# EAGLE board BasePlate (EAGLE 7.6.0)

Size 292.16 x 120 mm. Coordinates in mm from the lower left corner, seen from the top.
Outline: 53.08,120 113.08,120 arc-90 118.08,115 118.08,65 arc90 123.08,60 127.08,60 arc-90 132.08,55 132.08,54 arc90 137.08,49 155.08,49 arc90 160.08,54 160.08,55 arc-90 165.08,60 171.08,60 arc90 176.08,65 176.08,115 arc-90 181.08,120 239.08,120 arc-90 292.08,60 arc-90 239.08,0 53.08,0 arc-90 0.08,60 arc-90 53.08,120
Outline: 70.08,39 70.08,81 arc90 68.08,83 63.08,83 arc-90 61.08,85 61.08,86 arc90 59.08,88 17.08,88 arc90 15.08,86 15.08,85 arc-90 13.08,83 11.08,83 arc90 9.08,81 9.08,39 arc90 11.08,37 13.08,37 arc-90 15.08,35 15.08,34 arc90 17.08,32 59.08,32 arc90 61.08,34 61.08,35 arc-90 63.08,37 68.08,37 arc90 70.08,39
Outline: 223.08,37 229.08,37 arc-90 231.08,35 231.08,34 arc90 233.08,32 276.08,32 arc90 278.08,34 278.08,35 arc-90 280.08,37 281.08,37 arc90 283.08,39 283.08,81 arc90 281.08,83 279.08,83 arc-90 277.08,85 277.08,86 arc90 275.08,88 233.08,88 arc90 231.08,86 231.08,85 arc-90 229.08,83 223.08,83 arc90 221.08,81 221.08,39 arc90 223.08,37
Outline: 106.08,26 106.08,36.5 arc-90 107.08,37.5 108.58,37.5 arc90 111.58,40.5 111.58,42 arc-90 112.58,43 128.58,43 arc-90 129.58,42 129.58,26 arc-90 128.58,25 107.08,25 arc-90 106.08,26
Copper layers (1*16): Top 0.035mm / dielectric 1.5mm / Bottom 0.035mm
Design rules "default": minimum track width 10mil, minimum drill 24mil, track to track 8mil, track to pad 8mil, pad to pad 8mil, via to via 8mil, smd to smd 8mil, copper to edge 40mil, drill to drill 8mil, minimum pad ring 10mil, minimum via ring 8mil, stop-mask expansion 4mil, vias tented up to drill 0mil, thermal gap 10mil

## Footprints (pad centres in the part's own frame; a part is rotated, then mirrored left to right if it is on the bottom)
FRSKY-TARANIS-GIMBAL = hole 2.8: -27,27; -27,-27; 27,-27; 27,27
SPARKFUN_LCD_33 = hole 2.8: 77.5,2.5; 77.5,33.5; 2.5,2.5; 2.5,33.5
CONTROLLER_OUTLINE = hole 2.8: -64.5,-52.5; 64.5,-52.5; 64.5,52.5; -64.5,52.5
ATMEGA128RFA1 = drill 1.016 pad 1.88: 3.3V 26.67,2.54; 3.3V1 24.13,2.54; A0 39.37,2.54; A1 41.91,2.54; A2 44.45,2.54; A3 46.99,2.54; A4 49.53,2.54; A5 52.07,2.54; A6 54.61,2.54; A7 54.61,5.08; AREF 12.446,50.8; CLKI 32.766,45.72; GND 29.21,2.54; GND1 31.75,2.54; GND2 14.986,50.8; J2.D3 44.45,50.8; J2.D5 39.37,50.8; J2.D6 36.83,50.8; J2.D9 27.686,50.8; J2.D10 25.146,50.8; J2.D11 22.606,50.8; J2.IOREF 19.05,2.54; J2.NC 16.51,2.54; MISO 20.066,50.8; PB5 30.226,50.8; PD4 25.146,45.72; PD5 22.606,45.72; PD6 20.066,45.72; PD7 17.526,45.72; PE2 46.99,50.8; PE4 41.91,50.8; PE7 34.29,50.8; PG1 49.403,45.72; PG2 46.863,45.72; PG5 44.323,45.72; RESET 21.59,2.54; RX0 52.07,50.8; RX1 30.226,45.72; SCK 17.526,50.8; SCL 7.366,50.8; SDA 9.906,50.8; TST 35.306,45.72; TX0 49.53,50.8; TX1 27.686,45.72; VCC 34.29,2.54 | drill 1.016 pad 1.88 square: PG0 51.943,45.72

## Placement (x,y rotation side)
E$3  [FRSKY-TARANIS-GIMBAL]  38.08,60 0 top
E$4  [FRSKY-TARANIS-GIMBAL]  254.08,60 180 top
E$5  [SPARKFUN_LCD_33]  106.08,7 0 top
E$6  [CONTROLLER_OUTLINE]  146.08,60 0 top
E$7  [ATMEGA128RFA1]  120.58,118.5 270 top

## Library data of the parts
E$3-E$6 = RemoteParts
E$7 = BOBs